# Altium PCB PCB3.PcbDoc
Units mm, origin at the board's own origin, x right, y up, seen from the top; angles counter-clockwise.
Board outline 152.4 x 101.6 mm, 4 copper layers (Top Layer, Int1 (GND), Int2 (PWR), Bottom Layer), stack 1.57 mm thick; 35 components, 27 nets, 163 pads, 29 vias.
Unrouted connection lines stored in the file: 91.
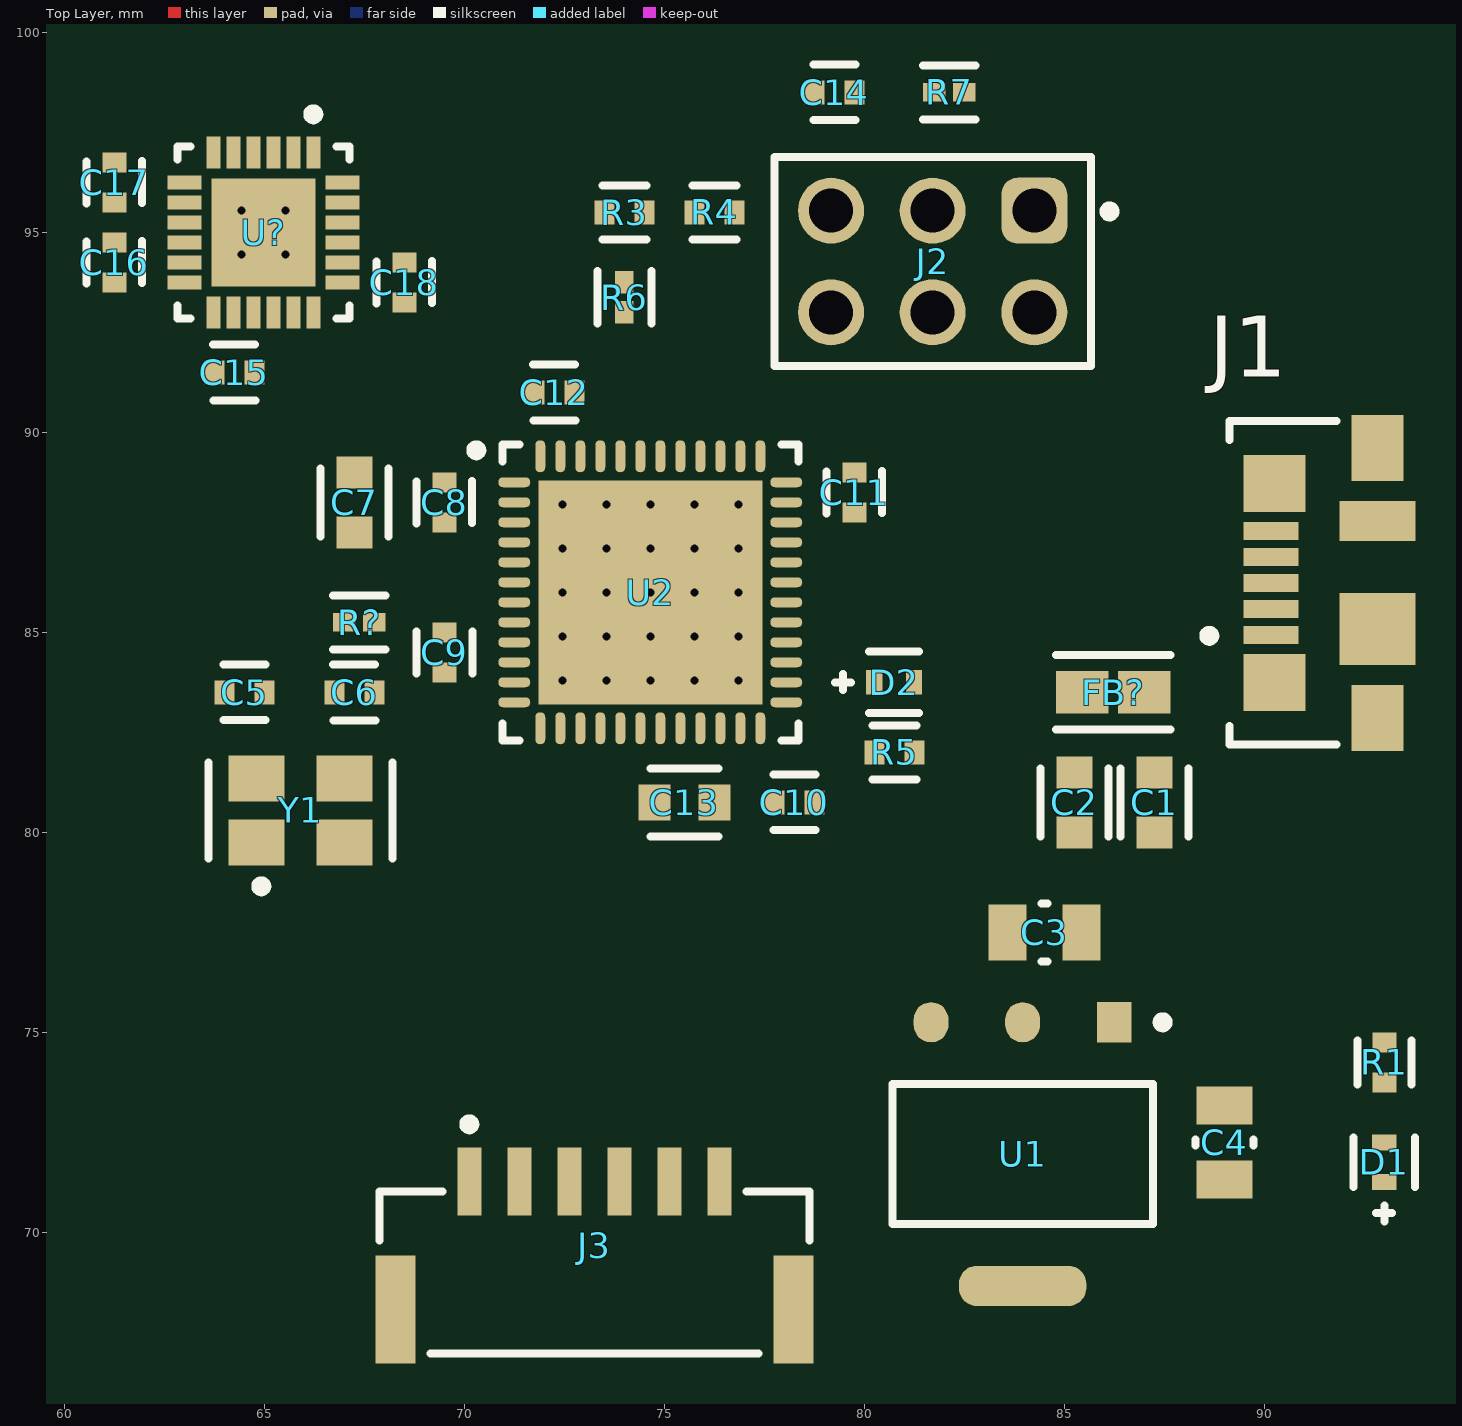
[diagram p0: Top Layer view]
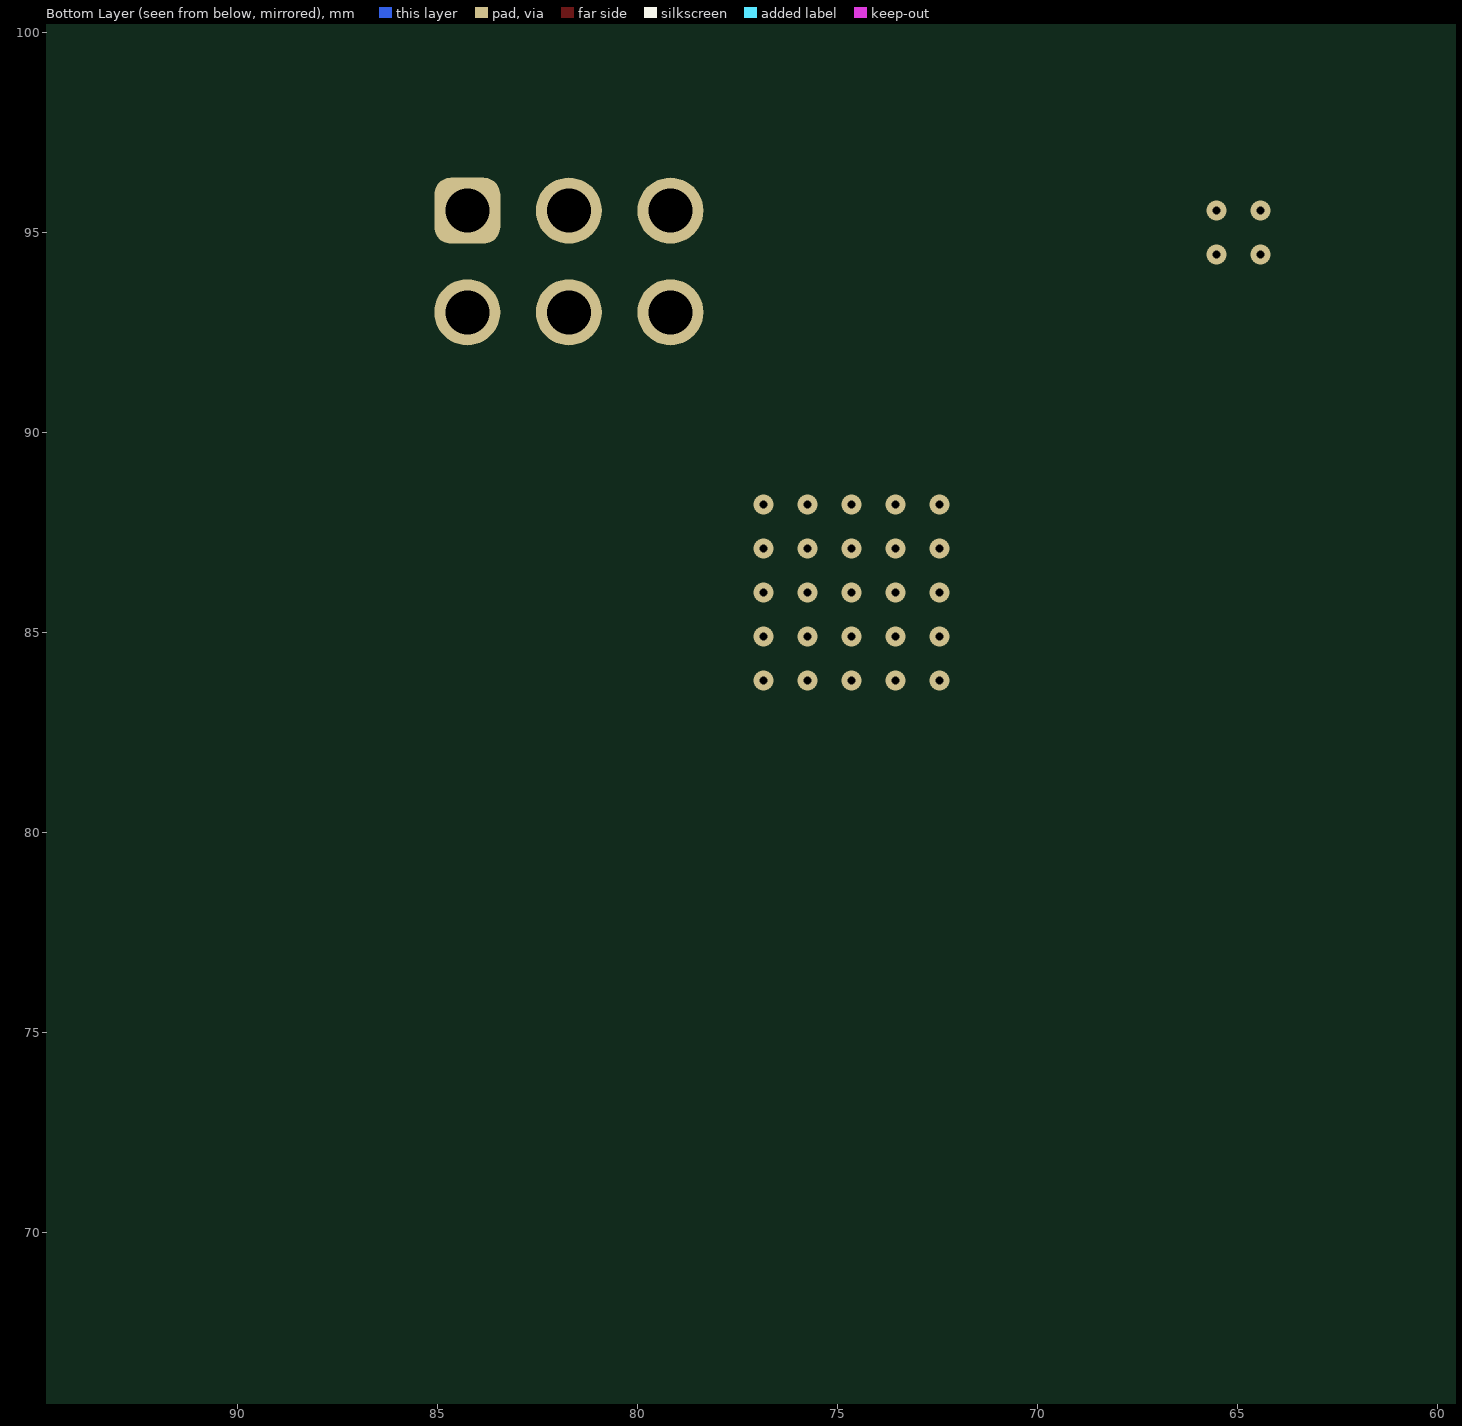
[diagram p1: Bottom Layer view, seen from below]

## Layer stack, top to bottom
Top Solder: solder mask 0.0254, SM-001, Dk 4
Top Layer: signal copper 0.035
Dielectric 1: prepreg 0.2, PP-017, Dk 4.6
Int1 (GND): signal copper 0.0175
Dielectric 3: core 1.065, Core-039, Dk 4.6
Int2 (PWR): signal copper 0.0175
Dielectric 5: prepreg 0.2, PP-017, Dk 4.6
Bottom Layer: signal copper 0.035
Bottom Solder: solder mask 0.0254, SM-001, Dk 4

## Board outline
25.4,25.4 177.8,25.4 177.8,127 25.4,127

## Design rules (kind name [scope] priority, off if disabled: settings)
Clearance [All] p1: gap=0.254 ignorepadtopadclearanceinfootprint=FALSE
DiffPairsRouting [All] p1: maxlimit=0.254 minlimit=0.254 mostfreqgap=0.254 toplayer_minwidth=0.381 toplayer_maxwidth=0.381 toplayer_prefwidth=0.381 midlayer1_minwidth=0.381 midlayer1_maxwidth=0.381 midlayer1_prefwidth=0.381 midlayer2_minwidth=0.381 midlayer2_maxwidth=0.381 midlayer2_prefwidth=0.381 bottomlayer_minwidth=0.381 bottomlayer_maxwidth=0.381 bottomlayer_prefwidth=0.381 maxuncoupledlength=12.7
PolygonConnect [All] p1: connectstyle=Relief reliefconductorwidth=0.254 reliefentries=4 polygonreliefangle="90 Angle" airgapwidth=0.254
RoutingVias [All] p1: holewidth=0.711 width=1.27 viastyle="Through Hole" minholewidth=0.711 minwidth=1.27 maxholewidth=0.711 maxwidth=1.27
SolderMaskExpansion [All] p1: expansion=0 istentingtop=FALSE
SupplyNets "Schematic Supply Nets_3" [InNet('VBUS')] p1: voltage=0.000
SupplyNets "Schematic Supply Nets_2" [InNet('+3V3')] p2: voltage=0.000
SupplyNets "Schematic Supply Nets_1" [InNet('+5V')] p3: voltage=0.000
SupplyNets "Schematic Supply Nets" [InNet('GND')] p4: voltage=0.000
Width [All] p1: maxlimit=0.254 minlimit=0.254 preferedwidth=0.254
29 further rules are at their usual default settings.

## Classes and differential pairs
differential pair class DIFF_USB: USB_D
differential pair USB_D: +USB_D_P -USB_D_N

## Components (designator, comment, footprint, x,y, rotation, side; value= is the part's Value field where it differs from the comment)
C1 "2u2" FP-CC0603-DA-MFG 87.25,80.75 r270 top value="100 nF"
C2 "2u2" FP-CC0603-DA-MFG 85.25,80.75 r270 top value="100 nF"
C3 "22u" FP-CC0805-1_25-MFG 84.5,77.5 r0 top value=10uF
C4 "22u" FP-CC0805-1_25-MFG 89,72.25 r90 top value=10uF
C5 "10p" FP-CC0402-0_05-0_55-L2_0-MFG 64.5,83.5 r0 top
C6 "10p" FP-CC0402-0_05-0_55-L2_0-MFG 67.25,83.5 r180 top
C7 "2u2" FP-CC0603-DA-MFG 67.25,88.25 r270 top value="100 nF"
C8 "100n" FP-CC0402-0_05-0_55-L2_0-MFG 69.5,88.25 r90 top
C9 "100n" FP-CC0402-0_05-0_55-L2_0-MFG 69.5,84.5 r270 top
C10 "100n" FP-CC0402-0_05-0_55-L2_0-MFG 78.25,80.75 r0 top
C11 "100n" FP-CC0402-0_05-0_55-L2_0-MFG 79.75,88.5 r90 top
C12 "100n" FP-CC0402-0_05-0_55-L2_0-MFG 72.25,91 r180 top
C13 "2u2" FP-CC0603-DA-MFG 75.5,80.75 r180 top value="100 nF"
C14 "100n" FP-CC0402-0_05-0_55-L2_0-MFG 79.25,98.5 r0 top
C15 "100n" FP-CC0402-0_05-0_55-L2_0-MFG 64.25,91.5 r180 top
C16 "100n" FP-CC0402-0_05-0_55-L2_0-MFG 61.25,94.25 r90 top
C17 "10n" FP-CC0402-0_05-0_55-L2_0-MFG 61.25,96.25 r90 top
C18 "2n2" FP-CC0402-0_05-0_55-L2_0-MFG 68.5,93.75 r90 top
D1 "SM0402GC" FP-SM0402GC-MFG 93,71.75 r90 top
D2 "SM0402GC" FP-SM0402GC-MFG 80.745,83.75 r0 top
FB? "120R" FP-BLM18-0_15-t0_8-IPC_A 86.224,83.5 r180 top
J1 "473460001" FP-473460001-MFG 92.475,86.238 r90 top
J2 "61300621121" 61300621121 81.71,94.27 r180 top
J3 "SM06B-GHS-TB(LF)(SN)" FP-SM06B-GHS-TB_LF_SN-MFG 73.25,69 r0 top
R1 "1k" FP-AT0402-MFG 93,74.25 r90 top
R3 "2k2" FP-AT0402-MFG 74,95.5 r180 top
R4 "2k2" FP-AT0402-MFG 76.25,95.5 r0 top
R5 "1k" FP-AT0402-MFG 80.75,82 r180 top
R6 "10K" FP-CRGCQ0402-IPC_C 74,93.376 r270 top value=10KΩ
R7 "10K" FP-CRGCQ0402-IPC_C 82.124,98.5 r0 top value=10KΩ
R? "0R" FP-CRGCQ0402-IPC_C 67.376,85.25 r180 top value=10KΩ
U1 "AMS1117-3.3" FP-AMS1117-IPC_C 83.96,71.955 r270 top
U2 "STM32F411CEU6" STM-UFQFPN48_L 74.65,86 r0 top
U? "MPU-6050" IS-QFN-24_V 64.975,95 r270 top
Y1 "24MHZ" FP-TSX-3225-MFG 65.9,80.55 r0 top

## Footprints (in the part's own frame and the unit in brackets; to place one, negate y for a bottom-side part, rotate by r counter-clockwise, add the part's x,y. Pads: shape width x height; smd on the part's side, far side on the other; paste and mask are expansions set on the pad)
61300621121 [mm] "Pin Header, pitch 2.54 mm, THT, Vertical, dual row, 6p"
  rrect50% 1.65x1.65 hole 1.1: 1(-2.54,-1.27)
  round 1.65 hole 1.1: 2(-2.54,1.27) 3(0,-1.27) 4(0,1.27) 5(2.54,-1.27) 6(2.54,1.27)
  silkscreen extent -4.54,-2.62 3.96,2.62, body extent -3.81,-2.54 3.81,2.54, height 8.59
FP-473460001-MFG [mm]
  rect 0.45x1.38 smd paste+0 mask+0: 1(-1.3,2.31) 2(-0.65,2.31) 3(0,2.31) 4(0.65,2.31) 5(1.3,2.31)
  rect 1.425x1.55 smd paste+0 mask+0: 6(-2.488,2.225) 7(2.488,2.225)
  rect 1.65x1.3 smd paste+0 mask+0: 8(-3.375,-0.35) 11(3.375,-0.35)
  rect 1.8x1.9 smd paste+0 mask+0: 9(-1.15,-0.35)
  rect 1x1.9 smd paste+0 mask+0: 10(1.55,-0.35)
  silkscreen extent -4.05,0.67 4.05,3.97, body extent -4.3,-2.48 4.3,3.45, height 0.25
FP-AMS1117-IPC_C [mm]
  rect 1.004x0.872 smd paste+0 mask+0: 1(-3.295,2.29)
  rrect100% 1.004x0.872 smd paste+0 mask+0: 2(-3.295,0) 3(-3.295,-2.29)
  rrect87% 1.004x3.182 smd paste+0 mask+0: 4(3.295,0)
  silkscreen extent -3.42,-3.25 1.75,3.63, body extent -3.9,-3.35 3.9,3.35, height 0.25
FP-AT0402-MFG [mm]
  rect 0.5x0.6 smd paste+0 mask+0: 1(-0.5,0) 2(0.5,0)
  silkscreen extent -0.55,-0.67 0.55,0.67, body extent -0.85,-0.4 0.85,0.4, height 0.25
FP-BLM18-0_15-t0_8-IPC_A [mm]
  rect 1.306x1.058 smd paste+0 mask+0: 1(-0.776,0) 2(0.776,0)
  silkscreen extent -1.43,-0.93 1.43,0.93, body extent -1.93,-1.03 1.93,1.03, height 0.25
FP-CC0402-0_05-0_55-L2_0-MFG [mm]
  rect 0.5x0.6 smd paste+0 mask+0: 1(-0.5,0) 2(0.5,0)
  silkscreen extent -0.53,-0.7 0.53,0.7, body extent -0.85,-0.4 0.85,0.4, height 0.25
FP-CC0603-DA-MFG [mm]
  rect 0.8x0.9 smd paste+0 mask+0: 1(-0.75,0) 2(0.75,0)
  silkscreen extent -0.85,-0.85 0.85,0.85, body extent -1.35,-0.75 1.35,0.75, height 0.25
FP-CC0805-1_25-MFG [mm]
  rect 0.95x1.4 smd paste+0 mask+0: 1(-0.925,0) 2(0.925,0)
  silkscreen extent -0.07,-0.72 0.07,0.72, body extent -1.6,-1.05 1.6,1.05, height 0.25
FP-CRGCQ0402-IPC_C [mm]
  rect 0.56x0.472 smd paste+0 mask+0: 1(-0.376,0) 2(0.376,0)
  silkscreen extent -0.66,-0.67 0.66,0.67, body extent -0.76,-0.38 0.76,0.38, height 0.25
FP-SM06B-GHS-TB_LF_SN-MFG [mm]
  rect 0.6x1.7 smd paste+0 mask+0: 1(-3.125,2.275) 2(-1.875,2.275) 3(-0.625,2.275) 4(0.625,2.275) 5(1.875,2.275) 6(3.125,2.275)
  rect 1x2.7 smd paste+0 mask+0: 7(-4.975,-0.925) 8(4.975,-0.925)
  silkscreen extent -5.38,-2.02 5.38,3.82, body extent -5.58,-2.37 5.58,3.22, height 0.25
FP-SM0402GC-MFG [mil]
  rect 16x24 smd paste+0 mask+0: 1(-19.5,0) 2(19.5,0)
  silkscreen extent -58,-30 25,31, body extent -31,-18 31,18, height 10
FP-TSX-3225-MFG [mm]
  rect 1.4x1.15 smd paste+0 mask+0: 1(-1.1,-0.8) 2(1.1,-0.8) 3(1.1,0.8) 4(-1.1,0.8)
  silkscreen extent -2.3,-2.02 2.3,1.2, body extent -1.9,-1.48 1.9,1.48, height 0.25
IS-QFN-24_V [mm] "QFN, 24-Leads, Body 4x4mm, Pitch 0.5mm, Thermal Pad 2.7x2.6mm"
  rect 0.8x0.35 smd: 1(-2,1.25) 2(-2,0.75) 3(-2,0.25) 4(-2,-0.25) 5(-2,-0.75) 6(-2,-1.25) 13(2,-1.25) 14(2,-0.75) 15(2,-0.25) 16(2,0.25) 17(2,0.75) 18(2,1.25)
  rect 0.35x0.85 smd mask+0.102: 7(-1.25,-1.975) 8(-0.75,-1.975) 9(-0.25,-1.975) 10(0.25,-1.975) 11(0.75,-1.975) 12(1.25,-1.975) 19(1.25,1.975) 20(0.75,1.975) 21(0.25,1.975) 22(-0.25,1.975) 23(-0.75,1.975) 24(-1.25,1.975)
  rect 2.7x2.6 smd: 25(0,0)
  silkscreen extent -3.07,-2.15 2.15,2.15, body extent -2,-2 2,2, height 0.95
STM-UFQFPN48_L [mm] "QFN, 48-Leads, Body 7.1x7.1mm, Pitch 0.5mm, Thermal Pad 5.6x5.6mm, IPC High Density"
  oval 0.8x0.25 smd: 1(-3.4,2.75) 2(-3.4,2.25) 3(-3.4,1.75) 4(-3.4,1.25) 5(-3.4,0.75) 6(-3.4,0.25) 7(-3.4,-0.25) 8(-3.4,-0.75) 9(-3.4,-1.25) 10(-3.4,-1.75) 11(-3.4,-2.25) 12(-3.4,-2.75) 25(3.4,-2.75) 26(3.4,-2.25) 27(3.4,-1.75) 28(3.4,-1.25) 29(3.4,-0.75) 30(3.4,-0.25) 31(3.4,0.25) 32(3.4,0.75) 33(3.4,1.25) 34(3.4,1.75) 35(3.4,2.25) 36(3.4,2.75)
  oval 0.25x0.8 smd: 13(-2.75,-3.4) 14(-2.25,-3.4) 15(-1.75,-3.4) 16(-1.25,-3.4) 17(-0.75,-3.4) 18(-0.25,-3.4) 19(0.25,-3.4) 20(0.75,-3.4) 21(1.25,-3.4) 22(1.75,-3.4) 23(2.25,-3.4) 24(2.75,-3.4) 37(2.75,3.4) 38(2.25,3.4) 39(1.75,3.4) 40(1.25,3.4) 41(0.75,3.4) 42(0.25,3.4) 43(-0.25,3.4) 44(-0.75,3.4) 45(-1.25,3.4) 46(-1.75,3.4) 47(-2.25,3.4) 48(-2.75,3.4)
  rect 5.6x5.6 smd: 49(0,0)
  silkscreen extent -4.47,-3.7 3.7,3.7, body extent -3.55,-3.55 3.55,3.55, height 0.6

## Part data
C1 C2 C7 C13: library part CMP-03422-001147-1, "CAP CER 0.1UF 16V X7R 0603", Capacitance="100 nF", Manufacturer=YAGEO, Manufacturer Part Number=CC0603MRX7R7BB104, Package=CC0603-DA, Temperature="-55°C to +125°C", Temperature Characteristic=X7R, Temperature Coefficient=15%, Temperature Range High=+125°C, Temperature Range Low=-55°C, Tolerance=0.2, Voltage="16 V", Automotive=No, Category=Cap, ComponentLink2Description=Datasheet, ComponentLink2URL=http://www.yageo.com/documents/recent/UPY-GPHC_X7R_6.3V-to-50V_18.pdf, Device Class L1="Passive Components", Device Class L2=Capacitors, Device Class L3="Ceramic Capacitors", Digikey Description="CAP CER 0.1UF 16V X7R 0603", Footprint Url=http://www.yageo.com/exep/pages/download/literatures/UPY-C_GEN_24.pdf, Height=0.9mm, Lead Free=Yes, Material=Ceramic, Mouser Description="Multilayer Ceramic Capacitors MLCC - SMD/SMT 100nF 16V X7R 20%", Octopart=https://octopart.com/cc0603mrx7r7bb104-yageo-12885115, RoHS=TRUE, Voltage Rating="16 V"
C3 C4: library part CMP-03422-000416-1, "CAP CER 10UF 16V X5R 0805", Capacitance=10uF, Manufacturer=Yageo, Manufacturer Part Number=CC0805KKX5R7BB106, Package=CC0805-1.25, Temperature="-55°C to +85°C", Temperature Characteristic=X5R, Temperature Coefficient=15%, Temperature Range High=+85°C, Temperature Range Low=-55°C, Tolerance=10%, Voltage Rating=16V, Automotive=No, Category=Cap, ComponentLink2Description=Datasheet, ComponentLink2URL=https://www.yageo.com/upload/media/product/productsearch/datasheet/mlcc/UPY-GPHC_X5R_4V-to-50V_25.pdf, Device Class L1="Passive Components", Device Class L2=Capacitors, Device Class L3="Ceramic Capacitors", Digikey Description="CAP CER 10UF 16V X5R 0805", Footprint Url=https://www.yageo.com/upload/website/yageo_UPY-C_GEN_24_19050911_476.pdf, Height=1.45mm, Ipc Land Pattern Name=CAPC200125X125, Lead Free=Yes, Material=Ceramic, Mouser Description="Multilayer Ceramic Capacitors MLCC - SMD/SMT 10uF 16V X5R 10%", Octopart=https://octopart.com/cc0805kkx5r7bb106-yageo-11926151, RoHS=TRUE
C5 C6 C8 C9 C10 C11 C12 C14 C15 C16 C17 C18: library part CMP-03422-001485-1, "CAP CER 0.1UF 16V X7R 0402", Capacitance=100nF, Case Code (Imperial)=0402, Case Code (Metric)=1005, Dielectric=X7R, Max Operating Temperature=125°C, Min Operating Temperature=-55°C, Package Quantity=10000, Resistor Type=Ceramic, Tolerance=5%, Voltage Rating=16V, Case/Package=0402, Construction=Flat, Depth=0.5mm, Halogen Free="Halogen Free", Height=0.5mm, Lead Free="Lead Free", Length=1mm, Mount="Surface Mount", Packaging="Tape and Reel", Radiation Hardening=No, RoHS Compliant=Yes, Series=CC, Thickness=0.022inch, Voltage Rating (DC)=16V, Width=0.02inch
D1 D2: library part CMP-35283-000001-2, "LED GREEN CLEAR 0402 SMD", Case Code (Imperial)=0402, Case Code (Metric)=1005, Color=Green, Forward Voltage=1.9V, Lens Color=Colorless, Test Current=20mA, Case/Package=0402, Dominant Wavelength=572nm, Height=0.71mm, Length=1mm, Lens Size=1mm, Lens Style=Flat, Lens Transparency=Clear, Luminous Intensity=28.5mcd, Mount="Surface Mount", Packaging="Tape and Reel", Viewing Angle=130°, Width=0.5mm
FB?: library part CMP-0686-00407-3, "Chip Ferrite Bead, 0603, 600Ω @ 100MHz, 0.65Ω, 25%, 200mA", Case Code (Imperial)=0603, Case Code (Metric)=1608, Current Rating=200mA, DC Resistance (DCR)=650mR, Frequency=100MHz, Max Operating Temperature=125°C, Min Operating Temperature=-55°C, Package Quantity=1, Tolerance=25%, Case/Package=0603, Core Material=Ferrite, DC Current=200mA, DC Resistance-Max=650mR, Depth=0.8mm, Height=0.8mm, Impedance=600R, Lead Free="Lead Free", Length=1.6mm, Material=Steel, Max Current Rating=200mA, Max DC Current=200mA, Military Standard=Not, Number of Circuits=1, Number of Lines=1, Number of Pins=2, Packaging="Tape and Reel", Radiation Hardening=No, REACH SVHC="No SVHC", Resistance=650mR, RoHS Compliant=Yes, Series=BLM18B, Shielding=Unshielded, Termination=SMD/SMT, Test Frequency=100MHz, Weight=7.1E-05oz, Width=0.8mm
J1: library part CMP-2000-05246-2, "CONN RCPT USB2.0 MICRO B SMD R/A", Current Rating=1.8A, Manufacturer=Molex, Package=0, Temperature="-30°C to +85°C", Temperature Range High=+85°C, Temperature Range Low=-30°C, Voltage Rating=30V, Automotive=No, Category=Conn, ComponentLink2Description=Datasheet, ComponentLink2URL=https://www.molex.com/webdocs/datasheets/pdf/en-us/0473460001_IO_CONNECTORS.pdf, Conn Orientation="Right Angle", Contact Material=Gold,Nickel, Device Class L1=Connectors, Device Class L2="USB Connectors", Device Class L3=unset, Digikey Description="CONN RCPT USB2.0 MICRO B SMD R/A", Footprint Url=https://www.molex.com/pdm_docs/sd/473460001_sd.pdf, Height=2.945mm, Is Female=yes, Lead Free=Yes, Manufacturer Part Number=473460001, Number Of Contacts=5, Octopart=https://octopart.com/47346-0001-molex-7164928, Pitch=0.65mm, RoHS=TRUE, Shielding=true, Usb Standard="USB 2.0"
J2: library part CMP-1502-01072-4, "THT Vertical Pin Header WR-PHD, Pitch 2.54 mm, Dual Row, 6 pins", Color=Black, Contact Resistance=20mΩ, Current Rating=3A, Max Operating Temperature=105°C, Min Operating Temperature=-40°C, Operating Supply Voltage=250V, Connector Type="Male Pin", Contact Material=Gold, Contact Mating Length=5.9944mm, Contact Plating=Gold, Gender=Male, Height=8.89mm, Lead Pitch=2.54mm, Mount="Through Hole", Number Of Contacts=6, Number of Pins=6, Number of Positions=6, Number of Rows=2, Orientation=Vertical, Packaging=Bulk, Pitch=2.54mm, RoHS=Compliant, Row Spacing=2.54mm, Termination=Solder, Voltage Rating=250V
J3: library part CMP-17439-000061-1, "CONN HEADER SMD R/A 6POS 1.25MM", Color=Natural, Contact Resistance=50mR, Current Rating=1A, Housing Color=Beige, Max Operating Temperature=85°C, Max Voltage Rating (AC)=50V, Min Operating Temperature=-25°C, Connector Type="Outer Shroud Contact", Contact Material=Bronze, Contact Plating=Tin, Depth=4.05mm, Fastening Type=Ramp, Housing Material=Polyamide, Lead Free="Lead Free", Length=10.75mm, Max Current Rating=1A, Mount="Surface Mount", Number Of Contacts=6, Number of Positions=6, Number of Rows=1, Orientation="Right Angle", Packaging="Tape and Reel", Pitch=1.25mm, Termination=Solder, Voltage Rating=50V
R1 R3 R4 R5: library part CMP-03412-049230-1, "Thin Film Chip Resistors Automotive Grade 1kΩ 1% 25ppm/°C 0402"
R6 R7 R?: library part CMP-03211-011107-1, "CRGCQ 0402 10K 1%", Ambient Temperature Range High=+70°C, Manufacturer="TE Connectivity", Manufacturer Part Number=CRGCQ0402F10K, Package=CRGCQ0402, Power Rating=0.0625W, Resistance=10KΩ, Temperature="-55°C to +155°C", Temperature Coefficient=±100ppm/°C, Temperature Range High=+155°C, Temperature Range Low=-55°C, Tolerance=0.01, Voltage Rating=50V, Automotive=Yes, Category=Res, ComponentLink2Description=Datasheet, ComponentLink2URL=https://www.te.com/commerce/DocumentDelivery/DDEController?Action=showdoc&DocId=Data+Sheet%7F1773204-3%7F1%7Fpdf%7FEnglish%7FENG_DS_1773204-3_1.pdf%7F4-2176347-922, Composition="Thick Film", Device Class L1="Passive Components", Device Class L2=Resistors, Device Class L3="Chip SMD Resistors", Digikey Description="CRGCQ 0402 10K 1%", Height=0.4mm, Ipc Land Pattern Name=RESC10050X35, Lead Free=Yes, Mouser Description="Res Thick Film 0402 10K Ohm 1% 0.063W(1/16W) ±100ppm/C Pad SMD Automotive T/R", Octopart=https://octopart.com/crgcq0402f10k-te+connectivity-91017932, RoHS=TRUE, Series=CRGCQ
U1: library part CMP-209535-000001-1, "LDO Voltage Regulators 1A, 3.3V", Dropout Voltage=1.1V, Manufacturer="Advanced Monolithic Systems", Max Junction Temp=+125°C, Max Power Dissipation=1.2W, Max Supply Voltage=15V, Nominal Supply Current=5mA, Output Current=1A, Output Voltage=3.3V, Package=AMS1117, Temperature="-40°C to +125°C", Temperature Range Low=-40°C, Automotive=No, Category=IC, ComponentLink2Description=Datasheet, ComponentLink2URL=http://www.advanced-monolithic.com/pdf/ds1117.pdf, Device Class L1="Integrated Circuits (ICs)", Device Class L2="Power Management ICs", Device Class L3="Voltage Regulators - Linear", Height=1.8mm, Ipc Land Pattern Name=SOT229P700X180-4, Lead Free=Yes, Manufacturer Part Number=AMS1117-3.3, Number Of Outputs=1, Octopart=https://octopart.com/ams1117-3.3-advanced+monolithic+systems-25899300, Output Type=Fixed, RoHS=TRUE, Standoff Height=0.64mm, Temperature Range High=+125°C
U2: library part CMP-0243-00165-1, "ARM Cortex-M4 32-bit MCU+FPU, 512 KB Flash, 128 KB RAM, 36 I/Os, 48-Pin UFQFPN, -40 to 85 degC, Tray", I/Os (High Current)=36, Operating Frequency(F) (Processor speed) (MHz)=100, Package Description=UFQFPN48, Package Reference="48-Pin Ultra Thin Fine Pitch Quad Flat No-Lead, 7 x 7 x 0.6 mm Body, 0.5 mm Pitch, Exposed Pad", Supply Voltage(Vcc) min (V)=1.7, ComponentLink1Description="Manufacturer URL", ComponentLink1URL=http://www.st.com/, ComponentLink2Description=Datasheet, ComponentLink2URL=http://www.st.com/st-web-ui/static/active/en/resource/technical/document/datasheet/DM00115249.pdf, Core="ARM Cortex-M4", DatasheetVersion="Rev. 6", FLASH Size (Prog) (kB)=512, Internal RAM Size (kB)=128, Mounting Technology="Surface Mount", Packing=Tray
U?: library part CMP-1753-00002-2, "3-Axis Gyroscope, Accelerometer and a Digital Motion Processor(TM) (DMP), 2.375 to 3.46 V, -40 to 85 degC, 24-Pin QFN, RoHS, Tape and Reel", Manufacturer=InvenSense, Standard Package=5,000, Category=Sensors,Transducers, Datasheet URL=http://datasheet.octopart.com/MPU-6050-InvenSense-datasheet-14421344.pdf, Datasheet Version="Rev. 3.3, 05/2012", Dynamic Catalog=MPU-6000™Series, Family=Multifunction, Featured Product=MPU-60506-Axis,IntegratedI²CSolution, Manufacturer URL=http://www.invensense.com/, Online Catalog=MPU-6000™Series, Other Names="1428-1007-2 / MPU6050", Output Type=Digital, Sensor Type=MotionTracking, Unit PriceUSD=Digital
Y1: library part CMP-36405-000018-1, "CRYSTAL 24.0000MHZ 9PF SMD", Case/Package=SMD/SMT, ESR (Equivalent Series Resistance)=40R, Frequency=24MHz, Frequency Stability=20ppm, Frequency Tolerance=10ppm, Load Capacitance=9pF, Max Operating Temperature=105°C, Min Operating Temperature=-40°C, Package Quantity=250, Depth=2.5mm, Drive Level=200uW, Height=0.024inch, Lead Free="Lead Free", Length=3.2mm, Mount="Surface Mount", Number of Pins=4, Packaging="Tape and Reel", RoHS Compliant=Yes, Series=TSX-3225, Termination=SMD/SMT, Tolerance=10ppm, Weight=0.000564oz, Width=2.5mm

## Via types
v1: diameter 0.5, hole 0.2, Top Layer to Bottom Layer, 29 vias

## Nets (pads, with @x,y where several pads share a name; then routed paths per layer and width w, separated by ;. In a path a pad name is that pad's centre, name@x,y a point inside that pad or via, vN(x,y) a via of type N, cw(c..) or ccw(c..) an arc to the next point about the centre after c; other vN are vias at no path point)
+3V3: C4.1 C7.1 C8.2 C9.2 C10.2 C11.2 C12.2 C15.2 C17.2 D1.1 J2.1 J3.1 R3.2 R4.2 R7.2 U1.2 U1.4 U2.1 U2.9 U2.24 U2.36 U2.48 U?.8 U?.13
+5V: C2.1 C3.1 FB?.2 U1.3
GND: C1.2 C2.2 C3.2 C4.2 C5.1 C6.1 C7.2 C8.1 C9.1 C10.1 C11.1 C12.1 C13.2 C14.1 C15.1 C16.1 C17.1 C18.1 J1.5 J2.5 J3.6 R1.2 R5.2 R6.1 U1.1 U2.8 U2.23 U2.35 U2.47 U2.49 U?.1 U?.9 U?.11 U?.18 U?.25
  other v1: 72.45,83.8 73.55,83.8 74.65,83.8 75.75,83.8 76.85,83.8 72.45,84.9 73.55,84.9 74.65,84.9 75.75,84.9 76.85,84.9 72.45,86 73.55,86 74.65,86 75.75,86 76.85,86 72.45,87.1 73.55,87.1 74.65,87.1 75.75,87.1 76.85,87.1 72.45,88.2 73.55,88.2 74.65,88.2 75.75,88.2 76.85,88.2 64.425,94.45 65.525,94.45 64.425,95.55 65.525,95.55
IMPU_REGOUT: C16.2 U?.10
IMU_CPOUT: C18.2 U?.20
IMU_INT: U2.45 U?.12
IMU_SCL: R3.1 U2.42 U?.23
IMU_SDA: R4.1 U2.43 U?.24
LED_PWR_K: D1.2 R1.1
MCU_BOOT0: R6.2 U2.44
MCU_LED_A: D2.1 U2.26
MCU_LED_K: D2.2 R5.1
MCU_NRST: C14.2 J2.3 R7.1 U2.7
MCU_OSC_IN: C5.2 U2.5 Y1.3
MCU_OSC_OUT: R?.1 U2.6
MCU_PA4: J3.2 U2.14
MCU_PA5: J3.3 U2.15
MCU_PA6: J3.4 U2.16
MCU_PA7: J3.5 U2.17
MCU_SWCLK: J2.4 U2.37
MCU_SWDIO: J2.2 U2.34
MCU_SWO: J2.6 U2.39
MCU_VCAP1: C13.1 U2.22
USB_D_N: J1.2 U2.32
USB_D_P: J1.3 U2.33
VBUS: C1.1 FB?.1 J1.1
XTAL_IN: C6.2 R?.2 Y1.1
pads on no net: J1.4 J1.6 J1.7 J1.8 J1.9 J1.10 J1.11 J3.7 J3.8 U2.2 U2.3 U2.4 U2.10 U2.11 U2.12 U2.13 U2.18 U2.19 U2.20 U2.21 U2.25 U2.27 U2.28 U2.29 U2.30 U2.31 U2.38 U2.40 U2.41 U2.46 U?.2 U?.3 U?.4 U?.5 U?.6 U?.7 U?.14 U?.15 U?.16 U?.17 U?.19 U?.21 U?.22 Y1.2 Y1.4